# EAGLE board Group 13 brd (EAGLE 9.2.0)
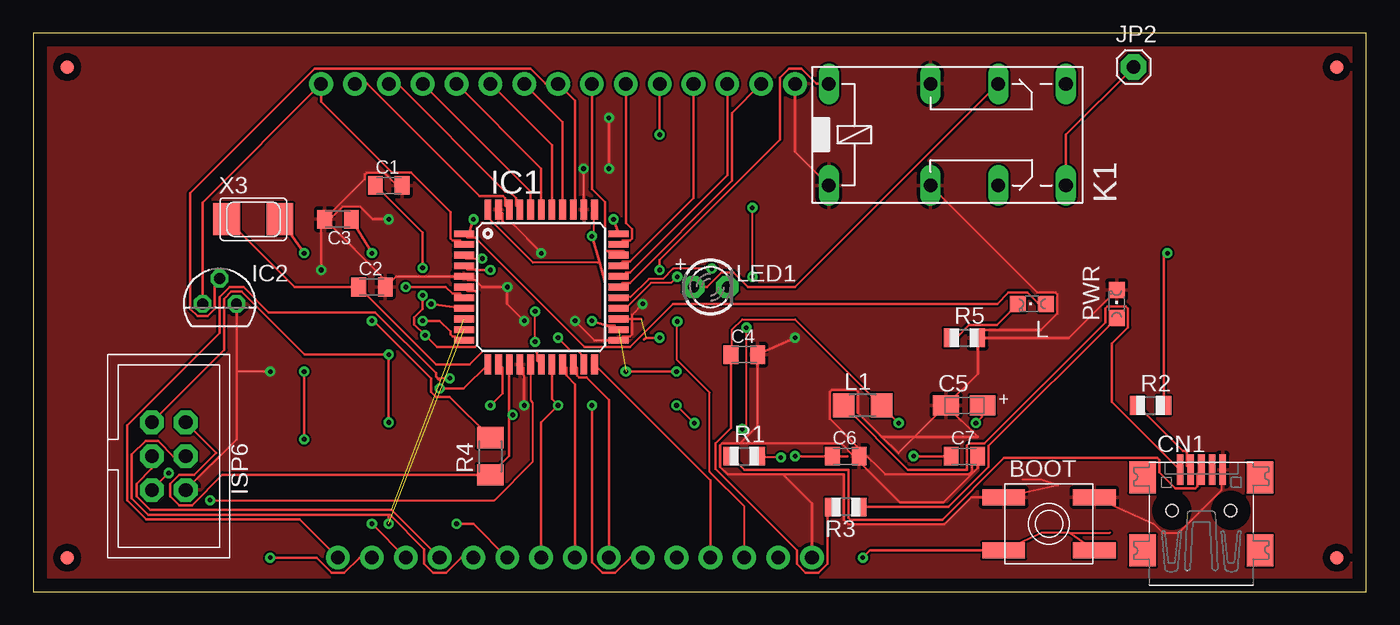
[diagram p0: board, top side]
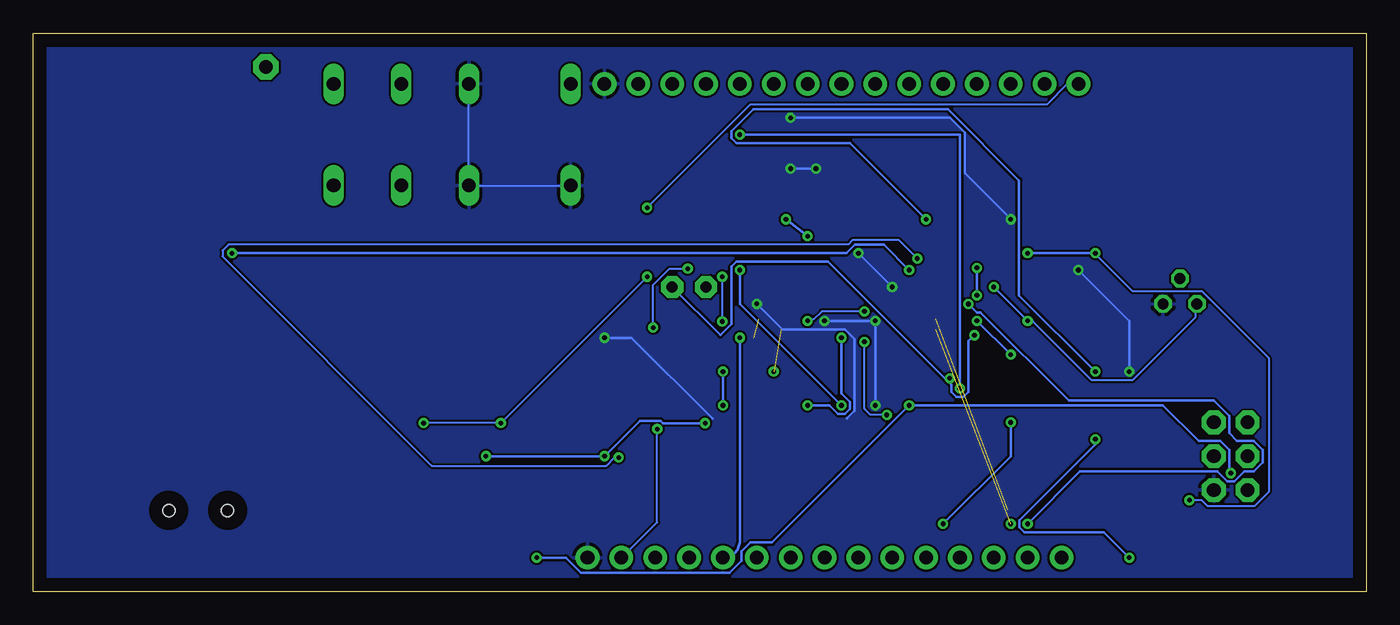
[diagram p1: board, bottom side, seen from below]

Size 100 x 41.9 mm. Coordinates in mm from the lower left corner, seen from the top.
Outline: 0,0 100,0 100,41.9 0,41.9 0,0
Copper layers (1*16): Top 0.035mm / dielectric 1.5mm / Bottom 0.035mm
Design rules "default": minimum track width 6mil, minimum drill 0.35mm, track to track 6mil, track to pad 6mil, pad to pad 6mil, via to via 6mil, smd to smd 6mil, copper to edge 40mil, drill to drill 6mil, minimum pad ring 10mil, minimum via ring 8mil, stop-mask expansion 4mil, vias tented up to drill 0mil, thermal gap 10mil

## Footprints (pad centres in the part's own frame; a part is rotated, then mirrored left to right if it is on the bottom)
EVQ-Q2 = smd 3.2 x 1.2: A -3.4,-2; A' 3.4,-2; B -3.4,2; B' 3.4,2
C0805K = smd 1.1 x 1.4: 1 -1,0; 2 1,0
A/3216-18R = smd 1.95 x 1.5: + 1.375,0; - -1.375,0
USB-MINIB = smd 0.5 x 2.308: D+ 0,4.064; D- -0.8,4.064; GND 1.6,4.064; ID 0.8,4.064; VBUS -1.6,4.064 | smd 2 x 2.4: GND1 -4.4,-2; GND2 -4.4,3.5; GND3 4.4,3.5; GND4 4.4,-2 | hole 0.9: -2.2,1; 2.2,1
TQFP44 = smd 1.5 x 0.5: 1 -5.8,4; 2 -5.8,3.2; 3 -5.8,2.4; 4 -5.8,1.6; 5 -5.8,0.8; 6 -5.8,0; 7 -5.8,-0.8; 8 -5.8,-1.6; 9 -5.8,-2.4; 10 -5.8,-3.2; 11 -5.8,-4; 23 5.8,-4; 24 5.8,-3.2; 25 5.8,-2.4; 26 5.8,-1.6; 27 5.8,-0.8; 28 5.8,0; 29 5.8,0.8; 30 5.8,1.6; 31 5.8,2.4; 32 5.8,3.2; 33 5.8,4 | smd 0.5 x 1.5: 12 -4,-5.8; 13 -3.2,-5.8; 14 -2.4,-5.8; 15 -1.6,-5.8; 16 -0.8,-5.8; 17 0,-5.8; 18 0.8,-5.8; 19 1.6,-5.8; 20 2.4,-5.8; 21 3.2,-5.8; 22 4,-5.8; 34 4,5.8; 35 3.2,5.8; 36 2.4,5.8; 37 1.6,5.8; 38 0.8,5.8; 39 0,5.8; 40 -0.8,5.8; 41 -1.6,5.8; 42 -2.4,5.8; 43 -3.2,5.8; 44 -4,5.8
TO92 = drill 0.813 octagon: 1 -1.27,0; 2 0,1.905; 3 1.27,0
ISP6 = drill 1.016 pad 1.778 octagon: 1 -2.54,-1.27; 2 -2.54,1.27; 3 0,-1.27; 4 0,1.27; 5 2.54,-1.27; 6 2.54,1.27
1X15-CB = drill 1.016 pad 1.778: 1 -17.78,0; 2 -15.24,0; 3 -12.7,0; 4 -10.16,0; 5 -7.62,0; 6 -5.08,0; 7 -2.54,0; 8 0,0; 9 2.54,0; 10 5.08,0; 11 7.62,0; 12 10.16,0; 13 12.7,0; 14 15.24,0; 15 17.78,0
1X01 = drill 1.016 pad 1.93 octagon: 1 0,0
351 = drill 1.016 long: 1 -3.81,-3.81; 16 -3.81,3.81; O1 8.89,-3.81; O2 8.89,3.81; P1 3.81,-3.81; P2 3.81,3.81; S1 13.97,-3.81; S2 13.97,3.81
CHIPLED_0805 = smd 1.2 x 1.2: A 0,-1.05; C 0,1.05
R1206 = smd 1.6 x 1.803: 1 -1.422,0; 2 1.422,0
LED3MM = drill 0.813 pad 1.676 octagon: A -1.27,0; K 1.27,0
R0805 = smd 1.1 x 1.4: 1 -1,0; 2 1,0
M1206 = smd 1.6 x 2: 1 -1.4,0; 2 1.4,0
FIDUCIAL_1MM = smd 1 x 1: 1 0,0
NX5032 = smd 2 x 2.4: P$1 2,0; P$2 -2,0

## Placement (x,y rotation side)
BOOT  EVQQ2  [EVQ-Q2]  76.2,5.08 0 top
C1  0.1uF  [C0805K]  26.67,30.48 0 top
C2  18pF  [C0805K]  25.4,22.86 0 top
C3  18pF  [C0805K]  22.86,27.94 180 top
C4  0.1uF  [C0805K]  53.34,17.78 0 top
C5  10uF  [A/3216-18R]  69.85,13.97 0 top
C6  0.1uF  [C0805K]  60.96,10.16 0 top
C7  0.1uF  [C0805K]  69.85,10.16 0 top
CN1  MiniB USB  [USB-MINIB]  87.63,5.08 0 top
IC1  ATMEGA32U4-AU  [TQFP44]  38.1,22.86 0 top
IC2  LM35CZ  [TO92]  13.97,21.59 0 top
ISP6  PINHD-2X3THM  [ISP6]  10.16,10.16 270 top
JP1  Breakout 1  [1X15-CB]  40.64,2.54 0 bottom
JP2  GND  [1X01]  82.55,39.37 0 top
JP5  Breakout 2  [1X15-CB]  39.37,38.1 0 top
K1  351  [351]  63.5,34.29 0 top
L  RED  [CHIPLED_0805]  74.93,21.59 90 top
L1  500mA  [R1206]  62.23,13.97 0 top
LED1  Orange  [LED3MM]  50.8,22.86 0 top
PWR  GREEN  [CHIPLED_0805]  81.28,21.59 0 top
R1  22  [R0805]  53.34,10.16 0 top
R2  22  [R0805]  83.82,13.97 0 top
R3  1K  [R0805]  60.96,6.35 180 top
R4  0  [M1206]  34.29,10.16 90 top
R5  1K  [R0805]  69.85,19.05 0 top
U$1  FIDUCIAL  [FIDUCIAL_1MM]  2.54,39.37 0 top
U$2  FIDUCIAL  [FIDUCIAL_1MM]  97.79,2.54 0 top
U$3  FIDUCIAL  [FIDUCIAL_1MM]  2.54,2.54 0 top
U$6  FIDUCIAL  [FIDUCIAL_1MM]  97.79,39.37 0 top
X3  16MHz  [NX5032]  16.51,27.94 0 top

## Library data of the parts
BOOT IC1 ISP6 X3 = adaprog
C1-C7 CN1 JP1 JP2 JP5 L L1 LED1 PWR R1-R3 R5 U$1-U$3 U$6 = adafruit
IC2 = lm35
K1 = relay; OC_FARNELL: unknown; OC_NEWARK: unknown
R4 = rcl; SPICEPREFIX: R

## Nets
+3V3: C1.1 IC1.6 JP1.15 LED1.K
+5V: C4.1 C5.+ IC1.2 IC1.7 IC2.1 JP5.1 L1.2 R3.2 R4.2
FAN_GROUND: JP2.1 K1.S1
GND: BOOT.B BOOT.B' C1.2 C2.2 C3.2 C4.2 C5.- C6.2 C7.2 CN1.GND IC1.5 IC1.15 IC1.23 IC1.35 IC1.43 IC2.3 ISP6.6 JP1.1 JP5.15 K1.1 K1.P1 K1.P2 PWR.C R5.2
MISO: IC1.11 ISP6.1 JP1.10
MOSI: IC1.10 ISP6.4 JP1.11
N$1: PWR.A R3.1
N$2: CN1.D- R2.1
N$3: IC1.3 R1.2
N$4: IC1.4 R2.2
N$5: CN1.D+ R1.1
N$6: IC1.42 JP5.2
N$7: IC1.37 JP5.7
N$8: C2.1 IC1.17 X3.P$2
N$9: C3.1 IC1.16 X3.P$1
N$10: L.C R5.1
N$12: K1.O2 LED1.A
N$13: IC1.31 JP5.9
N$14: IC1.32 JP5.10
PB0: IC1.8 JP1.13
PB4: IC1.28 JP5.14
PB5: IC1.29 JP5.13
PB6: IC1.30 JP5.12
PB7: IC1.12 JP5.11
PD0: IC1.18 JP1.9 K1.16
PD1: IC1.19 JP1.8
PD2: IC1.20 JP1.7
PD3: IC1.21 JP1.6
PD4: IC1.25 JP1.5
PD5: IC1.22 JP1.4
PD6: IC1.26 JP1.3
PD7: IC1.27 JP1.2
PE6: IC1.1 JP1.14 L.A
PF0: IC1.41 JP5.3
PF1: IC1.40 JP5.4
PF4: IC1.39 JP5.5
PF5: IC1.38 JP5.6
PF7: IC1.36 IC2.2 JP5.8
RST: BOOT.A BOOT.A' IC1.13 ISP6.5
SCK: IC1.9 ISP6.3 JP1.12
VBUS: CN1.VBUS L1.1
VCC: C6.1 C7.1 IC1.14 IC1.24 IC1.33 IC1.34 IC1.44 ISP6.2 R4.1

## Tracks (layer width: path | path; a pad name or v marks a point on that pad's centre or on a via)
+3V3  (via drill 0.35)
  Top 0.152: v31.24,16 30.48,16 30.41,15.94
  Top 0.203: C1.1 29.21,26.94 v29.21,24.29 | IC1.6 32.6,22.56 33.16,22.56 33.3,22.41 33.3,18.5 33.16,18.36 30.28,18.36 v29.4,19.24 28.58,20.06 28.58,20.58 29.21,21.21 v29.21,22.23 | JP1.15 19.99,5.41 8.48,5.41 7.04,6.85 7.04,12.46 13.97,19.4 13.97,22.12 14.71,22.86 15.77,22.86 17.67,20.95 25.66,20.95 30.2,16.41 30.2,16.15 30.41,15.94 30.48,15.87
  Bottom 0.152: 31.43,15.81 v31.24,16
  Bottom 0.203: v29.21,24.29 v29.21,22.23 | LED1.K 48.45,19.24 47.62,20.06 47.62,24.39 47.25,24.76 40.38,24.76 31.43,15.81 31.11,15.5 31.11,14.98 30.74,14.61 30.22,14.61 29.85,14.98 29.85,18.79 v29.4,19.24
+5V  (via drill 0.35)
  Top 0.152: C4.1 52.43,17.83 52.43,19.66 53.19,20.42 57.15,20.42 63.55,14.02 L1.2 63.7,13.87 v64.92,12.65 | v70.71,12.65 71.17,13.11 71.17,13.87 C5.+ | v53.95,23.62 v53.95,28.8
  Top 0.203: IC2.1 12.7,29.21 JP5.1 21.59,36.77 26.93,31.43 28.32,31.43 31.3,28.46 31.3,26.5 31.45,26.36 32,26.36 IC1.2 | R3.2 59.56,5.95 59.56,2.07 58.89,1.4 57.95,1.4 57.28,2.07 57.28,3.11 51.18,9.21 51.18,11.11 52.34,12.27 C4.1 | v25.4,20.32 25.53,20.32 29.85,16 29.85,14.98 30.22,14.61 31.24,14.61 R4.2 | IC1.7 32,22.36 31.45,22.36 30.94,22.86 v27.94,22.86
  Bottom 0.152: v25.4,20.32 25.3,20.27 24.99,20.27 20.57,15.85 17.53,15.85 12.8,20.57 12.8,21.49 IC2.1 | v70.71,12.65 v64.92,12.65 v53.95,23.62 | JP5.1 22.4,38.1 23.93,36.58 46.18,36.58 v53.95,28.8
  Bottom 0.203: v25.4,20.32 v27.94,22.86
FAN_GROUND
  Top 0.203: JP2.1 77.47,34.29 K1.S1
GND  (via drill 0.35)
  Top 0.152: CN1.GND 89.15,9.14 89.15,7.62 85.95,4.42 84.73,4.42 84.11,5.04 BOOT.B' | 74.22,8.38 75.61,8.38 76.9,7.96 BOOT.B
  Top 0.203: JP5.15 57.15,33.02 K1.1 | IC2.3 15.24,16.51 | 15.24,16.51 15.24,11.43 ISP6.6 | PWR.C 77.69,19.05 R5.2 | C5.- 70.85,16.34 R5.2 | R5.2 71.45,19.65 75.6,19.65 76.83,20.89 76.83,22.3 76.69,22.44 75.35,22.44 K1.P1 | JP1.1 58.42,6.62 56.25,8.79 | 61.57,10.16 60.62,11.11 53.02,11.11 | 61.57,10.16 C6.2 61.96,10.76 | 56.25,8.79 52.1,8.79 51.54,9.36 51.54,10.96 51.69,11.11 53.02,11.11 | 53.02,11.11 54.34,12.43 C4.2 v57.15,19.05 | C3.2 26.4,23.4 C2.2 27.2,23.66 IC1.5 32.6,23.36 33.16,23.36 33.66,22.86 v35.56,22.86 35.56,21.59 v36.83,20.32 | C1.2 27.28,30.48 26.32,31.43 25.02,31.43 24.87,31.29 24.87,30.95 C3.2 | C3.2 21.59,27.67 v21.59,24.13 | v17.78,16.51 15.24,16.51 | v38.1,25.4 38.1,25.46 35.9,27.66 35.34,27.66 35.2,27.8 35.2,28.36 IC1.43 | v36.83,13.97 36.83,16.17 36.8,16.2 36.8,16.76 IC1.15 | v40.64,20.32 42.1,18.86 IC1.23 44.2,19.16 44.76,19.16 44.9,19.3 44.9,20.77 v45.72,21.59 | C3.2 22.25,27.94 23.2,28.89 24.52,28.89 25.47,27.94 v26.67,27.94 | v43.18,35.56 v43.18,31.75 | v41.28,31.75 41.28,28.68 IC1.35 | C5.- 64.89,10.39 63.69,11.6 | 61.96,10.76 59.75,12.96 59.75,14.98 59.9,15.13 61.71,15.13 61.86,14.98 61.86,13.42 63.69,11.6 | C5.- 70.85,11.6 63.69,11.6 | 61.96,10.76 63.93,8.79 70.19,8.79 70.4,9 70.4,9.71 C7.2 70.85,9.26 68.29,6.71 65.02,6.71 61.57,10.16 | BOOT.B 70.39,7.08 68.34,5.04 61.16,5.04 60.8,5.4 60.8,8.79 56.25,8.79
  Bottom 0.152: K1.P2 67.36,38.1 67.36,30.48 K1.P1 K1.1
  Bottom 0.203: v21.59,24.13 17.78,20.32 v17.78,16.51 | v38.1,25.4 v35.56,22.86 | v36.83,13.97 v36.83,20.32 v40.64,20.32 | v26.67,27.94 30.12,31.39 30.12,34.44 31.25,35.56 v43.18,35.56 | v43.18,31.75 v41.28,31.75 | 38.96,12.98 38.38,13.56 38.38,18.96 39.11,19.68 43.81,19.68 v45.72,21.59 | v57.15,19.05 55.11,19.05 49.05,12.98
  pour Top: -1.27,43.18 101.6,43.18 101.6,-1.27 -1.27,-1.27
  pour Bottom: -1.27,43.18 101.6,43.18 101.6,-1.27 -1.27,-1.27
MISO  (via drill 0.35)
  Top 0.203: ISP6.1 14.33,18.14 14.33,21.97 14.86,22.5 15.62,22.5 20.34,17.78 v26.67,17.78 v26.67,12.7 | v29.21,20.32 30.48,20.32 31.3,19.5 31.3,19.3 31.45,19.16 31.64,19.16 31.94,18.86 IC1.11 | JP1.10 33.02,5.08 v31.75,5.08
  Bottom 0.203: v26.67,17.78 v29.21,20.32 | v31.75,5.08 26.67,10.16 v26.67,12.7
MOSI  (via drill 0.35)  (1 unrouted)
  Top 0.203: 26.75,5.77 8.62,5.77 7.39,7 7.39,10.28 8.42,11.3 9.36,11.3 10.51,10.16 ISP6.4 | 26.75,5.77 29.34,3.18 29.34,2.07 30.01,1.4 30.95,1.4 32.1,2.54 JP1.11 | 26.75,5.77 | 26.75,5.77 arc90 26.67,5.68 v26.67,5.08
N$1
  Top 0.203: PWR.A 71.65,10.91 71.65,9.36 68.65,6.35 R3.1
N$2
  Top 0.203: R2.1 86.24,10.55 86.39,10.55 86.53,10.4 86.53,9.44 CN1.D-
N$3  (via drill 0.35)
  Top 0.152: v56.08,10.06 54.41,10.06 R1.2 | v33.68,24.99 32.46,24.99 32.31,25.15 IC1.3
  Bottom 0.152: v56.08,10.06 56.39,10.06 57,9.45 70.1,9.45 85.8,25.15 85.8,25.6 85.34,26.06 38.86,26.06 38.56,26.36 35.05,26.36 v33.68,24.99
N$4  (via drill 0.35)
  Top 0.203: R2.2 84.82,25.13 v85.09,25.4 | v34.29,24.13 33.19,24.13 33.16,24.16 32.6,24.16 IC1.4
  Bottom 0.203: v85.09,25.4 38.99,25.4 38.36,26.03 36.19,26.03 v34.29,24.13
N$5
  Top 0.203: R1.1 53.36,9.14 61.16,9.14 61.16,5.54 61.3,5.4 68.2,5.4 72.84,10.03 84.33,10.03 84.48,9.88 84.48,8.93 85.67,7.74 87.19,7.74 87.33,7.88 87.33,8.85 CN1.D+
N$6
  Top 0.203: IC1.42 35.4,28.96 35.4,29.52 35.26,29.66 33.49,29.66 25.05,38.1 JP5.2
N$7
  Top 0.203: JP5.7 39.7,35.23 IC1.37
N$8
  Top 0.203: X3.P$2 19.59,22.86 C2.1 30.2,17.06 32.74,17.06 33.74,18.06 37.66,18.06 37.8,17.91 37.8,17.36 IC1.17
N$9  (via drill 0.35)
  Top 0.152: v13.26,6.86 34.59,6.86 37.49,9.75 37.49,14.17 37.34,14.33 37.34,16.92 IC1.16
  Top 0.203: C3.1 v25.4,25.4 | v20.32,25.4 X3.P$1
  Bottom 0.152: v13.26,6.86 12.34,6.86 11.89,6.4 8.38,6.4 7.32,7.47 7.32,17.53 12.34,22.55 17.53,22.55 20.27,25.3 v20.32,25.4
  Bottom 0.203: v25.4,25.4 v20.32,25.4
N$10
  Top 0.203: L.C 72.29,20 70.19,20 69.24,19.05 R5.1
N$12
  Top 0.203: K1.O2 57.15,22.86 53.62,22.86 52.52,23.95 51.62,23.95 50.52,22.86 LED1.A
N$13
  Top 0.203: JP5.9 41.91,30.21 42.9,29.22 42.9,25.7 43.05,25.56 44.29,25.56 44.45,25.4 44.31,25.26 IC1.31
N$14
  Top 0.203: IC1.32 44.2,26.36 44.76,26.36 44.9,26.5 44.9,27.21 44.45,27.67 JP5.10
PB0  (via drill 0.35)
  Top 0.203: IC1.8 v29.85,21.58 | v25.4,5.08 JP1.13
  Bottom 0.203: v29.85,21.58 29.22,20.95 28.95,20.95 22.32,14.33 11.44,14.33 10.29,13.17 10.29,11.89 9.7,11.3 8.42,11.3 7.75,10.63 7.75,9.69 8.42,9.02 9.14,9.02 9.9,8.26 10.42,8.26 11.18,9.02 21.46,9.02 v25.4,5.08
PB4
  Top 0.203: JP5.14 52.43,35.92 52.43,30.83 44.76,23.16 44.2,23.16 IC1.28
PB5
  Top 0.203: JP5.13 52.07,31.27 44.76,23.96 44.45,23.96 44.15,23.66 IC1.29
PB6
  Top 0.203: IC1.30 44.2,24.76 44.76,24.76 49.53,29.53 JP5.12
PB7  (via drill 0.35)
  Top 0.203: JP5.11 v46.99,34.29 | IC1.12 32.28,15.24 v30.48,15.24
  Bottom 0.203: v46.99,34.29 30.48,34.29 v30.48,15.24
PD0  (via drill 0.35)
  Top 0.203: v46.99,24.13 46.99,24.89 56.01,33.91 56.01,38.57 56.68,39.24 57.62,39.24 58.77,38.1 K1.16 | IC1.18 38.9,14.44 v39.37,13.97 38.1,12.7 JP1.9
  Bottom 0.203: v46.99,24.13 46.99,21.59 v39.37,13.97
PD1
  Top 0.203: IC1.19 40,16.76 40,16.2 40.64,15.56 JP1.8
PD2
  Top 0.203: JP1.7 43.18,14.38 41.5,16.06 40.95,16.06 40.8,16.2 40.8,16.76 IC1.20
PD3  (via drill 0.35)
  Top 0.203: JP1.6 44.8,2.54 43.65,1.4 42.71,1.4 41.91,2.19 v41.91,13.97 | v39.37,19.05 40.36,18.06 40.85,18.06 41.3,17.62 IC1.21
  Bottom 0.203: v41.91,13.97 40.26,13.97 39.63,13.34 39.11,13.34 38.74,13.71 38.74,14.23 39.37,14.86 v39.37,19.05
PD4  (via drill 0.35)  (1 unrouted)
  Top 0.203: 45.58,20.46 IC1.25 | v46.99,19.05 45.95,19.05 45.84,18.93
  Bottom 0.203: JP1.5 arc-90 46.99,3.81 v46.99,19.05
PD5
  Top 0.203: JP1.4 50.8,8.36 IC1.22
PD6  (via drill 0.35)
  Top 0.152: v48.31,23.62 47.85,23.16 46.33,23.16 44.5,21.34 44.04,21.34 IC1.26 | v48.31,20.27 48.31,17.37 50.75,14.94 50.75,8.99 53.34,6.4 JP1.3
  Bottom 0.152: v48.31,20.27 v48.31,23.62
PD7  (via drill 0.35)
  Top 0.152: v50.9,24.23 48.01,24.23 47.24,23.47 46.18,23.47 44.81,22.1 44.04,22.1 IC1.27 | v53.49,19.81 53.49,12.5 v53.19,12.19
  Bottom 0.152: v50.9,24.23 52.27,24.23 53.49,23.01 v53.49,19.81 | v53.19,12.19 53.19,5.18 55.78,2.59 JP1.2
PE6  (via drill 0.35)
  Top 0.203: 32.6,26.56 33.16,26.56 41.36,18.36 44.76,18.36 47.99,21.59 72.32,21.59 73.17,22.44 74.58,22.44 75.44,21.59 L.A | 32.6,26.56 IC1.1 | JP1.14 24.48,2.54 23.33,1.4 22.39,1.4 21.24,2.54 v17.78,2.54 | v20.32,11.43 v20.32,16.51 | v33.02,27.94 32.6,26.56
  Bottom 0.203: v17.78,2.54 19.69,4.45 25.66,4.45 26.03,4.82 26.03,5.34 20.32,11.05 v20.32,11.43 | v33.02,27.94 38.74,33.66 47.25,33.66 47.62,34.03 47.62,34.55 45.98,36.19 31.38,36.19 26.04,30.85 26.04,22.23 v20.32,16.51
PF0
  Top 0.203: IC1.41 36.2,28.96 36.2,29.52 35.7,30.02 35.4,30.02 27.32,38.1 JP5.3
PF1
  Top 0.203: JP5.4 37.3,30.01 IC1.40
PF4
  Top 0.203: JP5.5 38.1,31.75 IC1.39
PF5
  Top 0.203: JP5.6 38.9,33.49 IC1.38
PF7
  Top 0.203: IC1.36 40.64,28.8 40.64,36.83 JP5.8 38.45,38.1 37.3,39.24 21.12,39.24 11.79,29.91 11.79,21.21 12.32,20.68 13.08,20.68 13.61,21.21 13.61,23.14 IC2.2
RST  (via drill 0.35)
  Top 0.152: 77.71,4.42 75.66,4.42 BOOT.A | 77.71,4.42 80.77,4.42 | BOOT.A' 77.71,4.42
  Top 0.203: ISP6.5 v10.16,8.89 | v34.29,13.97 35.2,14.88 35.2,16.76 IC1.13 | BOOT.A 62.77,3.08 v62.23,2.54
  Bottom 0.203: v10.16,8.89 10.29,9.02 10.29,10.63 10.96,11.3 12.57,11.3 15.24,13.97 v34.29,13.97 44.58,3.68 46.19,3.68 46.86,3.01 46.86,2.32 47.79,1.4 58.89,1.4 60.04,2.54 v62.23,2.54
SCK  (1 unrouted)
  Top 0.203: JP1.12 26.9,6.12 8.77,6.12 7.75,7.15 7.75,8.09 8.89,9.24 ISP6.3
VBUS
  Top 0.203: L1.1 65.63,9.14 70.05,9.14 70.05,10.96 70.19,11.11 71.35,11.11 80.43,20.19 80.43,21.25 80.58,21.39 81.98,21.39 82.13,21.25 82.13,19.84 80.93,18.63 80.93,14.24 CN1.VBUS
VCC  (via drill 0.35)  (1 unrouted)
  Top 0.152: IC1.44 34.14,28.65 34.14,28.04 37.49,24.69 42.37,24.69 42.47,24.72 | v41.91,26.67 42.06,26.82 42.06,28.65 IC1.34 | v37.64,18.75 v37.64,21.03 | v35.97,13.26 35.7,13.26 35.66,13.26
  Top 0.203: ISP6.2 13.72,10.41 12.07,8.76 10.96,8.76 10.29,8.09 10.29,7.15 10.96,6.48 11.9,6.48 14.19,8.76 R4.1 35.7,10.17 35.7,13.26 IC1.14 | 61.07,10.16 C6.1 v57.15,10.16 | C7.1 v66.04,10.16 | v41.91,26.67 42.47,24.72 42.9,23.2 42.9,20.11 43.05,19.96 43.6,19.96 IC1.24 v41.91,20.32 | v43.53,27.94 IC1.33 | v48.26,16.51 v44.45,16.51 | v48.26,13.97 v49.59,12.64
  Bottom 0.152: v37.64,21.03 40.84,21.03 41.45,20.42 41.91,20.42 v41.91,20.32 | v37.64,18.75 37.64,13.72 37.19,13.26 v35.97,13.26 | 48.16,16.46 v48.26,16.51
  Bottom 0.203: v66.04,10.16 v57.15,10.16 54.49,12.82 52.93,12.82 52.74,12.64 v49.59,12.64 | v41.91,26.67 v43.53,27.94 | v48.26,16.51 v48.26,13.97